# EAGLE board slave-board (EAGLE 9.0.1)
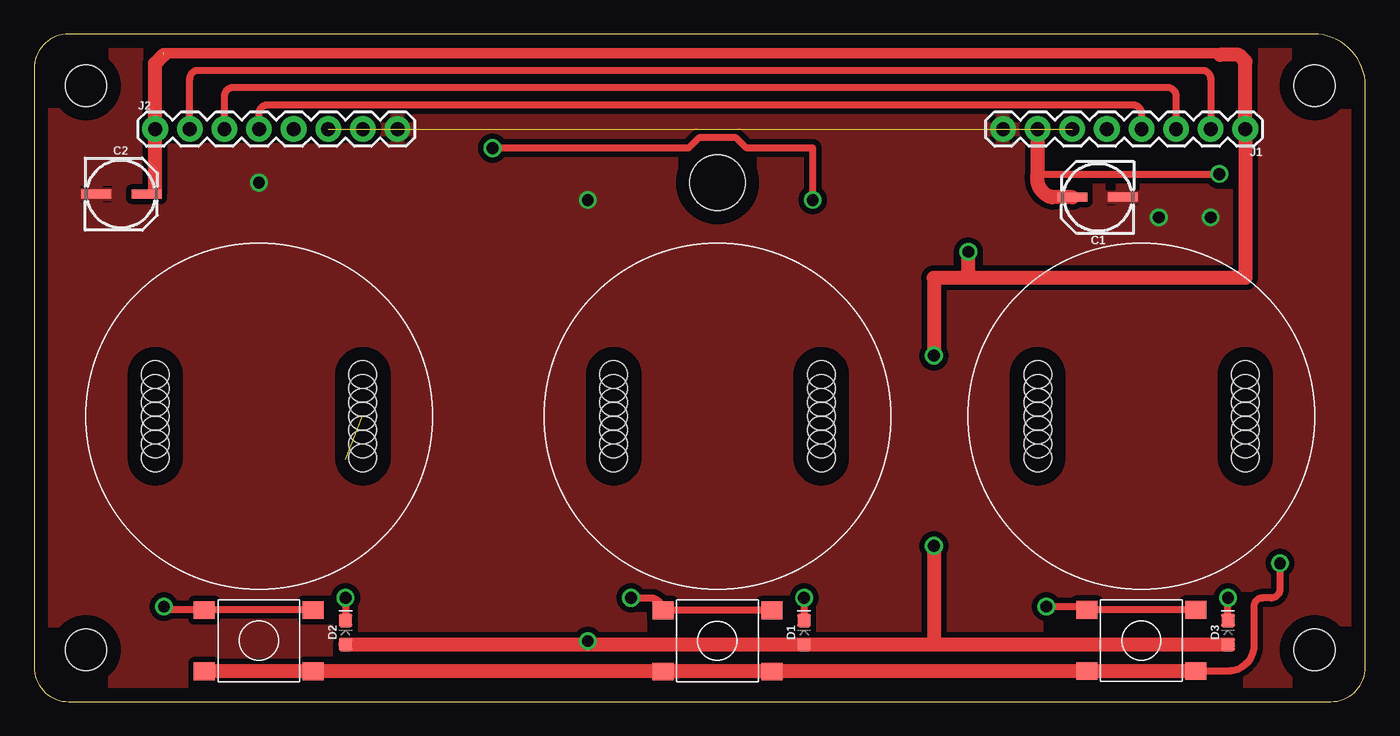
[diagram p0: board, top side]
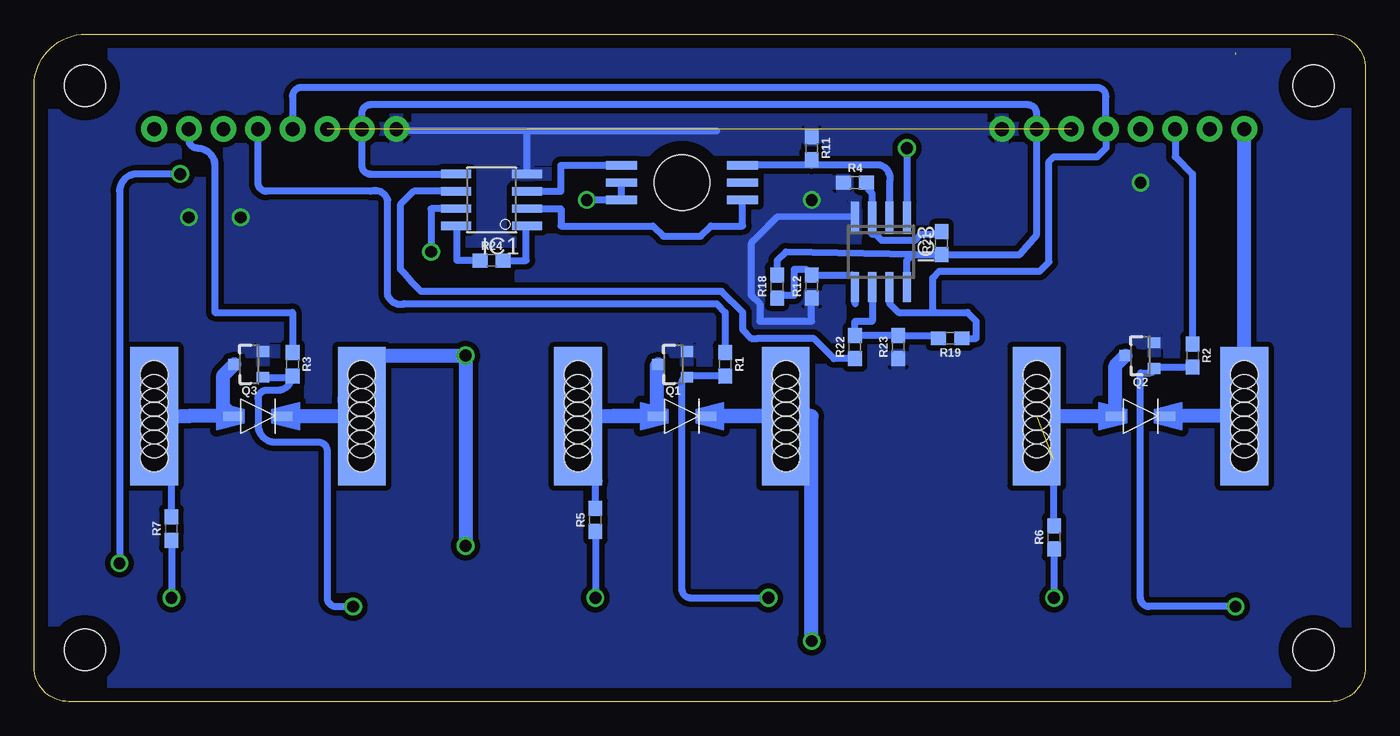
[diagram p1: board, bottom side, seen from below]

Size 97.71 x 49.01 mm. Coordinates in mm from the lower left corner, seen from the top.
Outline: 0,46.47 0,2.54 arc90 2.54,0 95.17,0 arc90 97.71,2.54 97.71,45.2 arc90 93.9,49.01 2.54,49.01 arc90 0,46.47
Copper layers (1*16): Top 0.035mm / dielectric 1.5mm / Bottom 0.035mm
Design rules "default *": minimum track width 6mil, minimum drill 0.35mm, track to track 16mil, track to pad 16mil, pad to pad 16mil, via to via 16mil, smd to smd 16mil, copper to edge 40mil, drill to drill 6mil, minimum pad ring 10mil, minimum via ring 8mil, stop-mask expansion 4mil, vias tented up to drill 0mil, thermal gap 10mil
Holes 3.05 mm at 3.81,3.81 3.81,45.21 93.98,45.21 93.98,3.81

## Footprints (pad centres in the part's own frame; a part is rotated, then mirrored left to right if it is on the bottom)
PANASONIC_C = smd 2.2 x 0.65: + 1.9,-0.2; - -1.8,-0.2
LED-0603 = smd 1 x 1: A -0.877,0; C 0.877,0
SO08 = smd 0.61 x 2.21: 1 -1.905,-2.616; 2 -0.635,-2.616; 3 0.635,-2.616; 4 1.905,-2.616; 5 1.905,2.616; 6 0.635,2.616; 7 -0.635,2.616; 8 -1.905,2.616
SO08' = smd 0.6 x 2.2: 1 -1.905,-2.6; 2 -0.635,-2.6; 3 0.635,-2.6; 4 1.905,-2.6; 5 1.905,2.6; 6 0.635,2.6; 7 -0.635,2.6; 8 -1.905,2.6
1X08 = drill 1.016 pad 1.88: 1 0,0; 2 2.54,0; 3 5.08,0; 4 7.62,0; 5 10.16,0; 6 12.7,0; 7 15.24,0; 8 17.78,0
SOT23-3 = smd 0.8 x 0.9: 1 -0.95,-1; 2 0.95,-1; 3 0,1.1
0603 = smd 1.1 x 1: 1 -0.85,0; 2 0.85,0
2SMPP-03 = smd 2.286 x 0.61 bottom: P$1 4.445,1.27; P$2 4.445,0; P$3 4.445,-1.27; P$4 -4.445,-1.27; P$5 -4.445,0; P$6 -4.445,1.27 | hole 4.064: 0,0
CJV23 = smd 3.5 x 10.16 bottom: P$1 -7.62,0; P$2 7.62,0 | hole 2.032: -7.62,0; 7.62,0; -7.62,1.016; -7.62,2.032; -7.62,3.048; -7.62,-1.016; -7.62,-2.032; -7.62,-3.048; 7.62,-1.016; 7.62,-2.032; 7.62,-3.048; 7.62,1.016; 7.62,2.032; 7.62,3.048
IN4148 = smd 1.422 x 0.711: P$1 1.829,0; P$2 -1.829,0
BUTTON = smd 1.55 x 1.3: P$1 -4,2.25; P$2 -4,-2.25; P$3 4,2.25; P$4 4,-2.25

## Placement (x,y rotation side)
C1  22uF  [PANASONIC_C]  78.11,36.83 180 top
C2  22uF  [PANASONIC_C]  6.35,37.47 0 top
D1  GREEN  [LED-0603]  56.52,5.08 90 top
D2  GREEN  [LED-0603]  22.86,5.08 90 top
D3  GREEN  [LED-0603]  87.63,5.08 90 top
IC1  INA126U  [SO08]  64.14,36.83 90 bottom
IC3  LM358MX  [SO08']  35.56,33.02 180 bottom
J1  [1X08]  88.9,42.04 180 top
J2  [1X08]  8.89,42.04 0 top
Q1  600mA/40V  [SOT23-3]  50.8,24.77 90 bottom
Q2  600mA/40V  [SOT23-3]  16.51,25.4 90 bottom
Q3  600mA/40V  [SOT23-3]  81.92,24.77 90 bottom
R1  1k  [0603]  46.99,24.77 270 bottom
R2  1k  [0603]  12.7,25.4 270 bottom
R3  1k  [0603]  78.74,24.77 270 bottom
R4  10k  [0603]  37.47,38.1 0 bottom
R5  10k  [0603]  56.52,13.34 90 bottom
R6  10k  [0603]  22.86,12.06 90 bottom
R7  10k  [0603]  87.63,12.7 90 bottom
R11  10k  [0603]  40.64,40.64 270 bottom
R12  10k  [0603]  40.64,30.48 90 bottom
R18  10k  [0603]  43.18,30.48 90 bottom
R19  10k  [0603]  30.48,26.67 180 bottom
R21  40K  [0603]  31.11,33.66 90 bottom
R22  20K  [0603]  37.47,26.04 90 bottom
R23  20K  [0603]  34.29,26.04 90 bottom
R24  2K  [0603]  64.14,32.38 0 bottom
U$1  2SMPP-03  [2SMPP-03]  50.16,38.1 180 top
U$2  CJV23-SOLENOID-VALVE  [CJV23]  50.16,20.95 0 top
U$3  CJV23-SOLENOID-VALVE  [CJV23]  16.51,20.95 0 top
U$4  CJV23-SOLENOID-VALVE  [CJV23]  81.28,20.95 0 top
U$5  IN4148  [IN4148]  50.16,20.95 0 bottom
U$6  IN4148  [IN4148]  16.51,20.95 0 bottom
U$7  IN4148  [IN4148]  81.28,20.95 0 bottom
U$8  BUTTON  [BUTTON]  50.15,4.46 180 top
U$9  BUTTON  [BUTTON]  16.5,4.47 180 top
U$10  BUTTON  [BUTTON]  81.27,4.49 180 top

## Library data of the parts
C1 C2 = SparkFun-Capacitors; PROD_ID: CAP-08618
D1-D3 = SparkFun-LED; PROD_ID: DIO-00821
IC1 = INA126; AVAILABILITY: Unavailable; DESCRIPTION: the ina126 and ina2126 are precision instrumentation amplifiers for accurate low noise differential signal acquisitio...; MF: Texas Instruments; MP: INA126; PACKAGE: TSSOP-8 Texas Instruments; PRICE: None
IC3 = linear
J1 J2 = SparkFun-Connectors; PROD_ID: CONN-08438
Q1-Q3 = SparkFun-DiscreteSemi; PROD_ID: TRANS-08049
R1-R3 = SparkFun-Resistors; PROD_ID: RES-07856
R4-R7 R11 R12 R18 R19 R21-R24 = SparkFun-Resistors; PROD_ID: RES-00824
U$1-U$10 = programmable-air-components

## Nets
GND: C1.- C2.- IC1.4 IC3.4 J1.8 J2.8 Q1.2 Q2.2 Q3.2 R4.1 R11.1 R12.1 R23.1
N$1: Q1.1 R1.2 U$8.P$2 U$8.P$4
N$2: Q2.1 R2.2 U$9.P$2 U$9.P$4
N$3: Q3.1 R3.2 U$10.P$2 U$10.P$4
N$4: IC1.2 U$1.P$1
N$5: J1.2 J2.2 R3.1
N$6: D3.C R7.1
N$7: Q3.3 R7.2 U$4.P$2 U$7.P$2
N$8: Q2.3 R6.2 U$3.P$2 U$6.P$2
N$9: Q1.3 R5.2 U$2.P$2 U$5.P$2
N$10: J1.3 J2.3 R2.1
N$11: D2.C R6.1
N$12: J1.4 J2.4 R1.1
N$13: IC3.7 J1.5 J2.5 R19.1
N$14: J1.6 J2.6
N$15: C1.+ IC1.5 IC3.8 J1.7 J2.7 R18.2 R21.1 U$8.P$1 U$8.P$3 U$9.P$1 U$9.P$3 U$10.P$1 U$10.P$3
N$16: IC1.6 R22.1
N$18: D1.C R5.1
N$19: IC3.1 U$1.P$5 U$1.P$6
N$20: IC1.3 U$1.P$4
N$24: IC3.3 R4.2 R21.2
N$25: IC1.8 R24.1
N$26: IC1.1 R24.2
N$27: IC3.6 R19.2 R22.2 R23.2
N$30: IC3.5 R12.2 R18.1
N$31: IC3.2 R11.2 U$1.P$3
VIN: C2.+ D1.A D2.A D3.A IC1.7 J1.1 J2.1 U$2.P$1 U$3.P$1 U$4.P$1 U$5.P$1 U$6.P$1 U$7.P$1

## Tracks (layer width: path | path; a pad name or v marks a point on that pad's centre or on a via)
GND  (via drill 0.86)
  Bottom 0.508: IC1.4 61.52,41.83 arc-90 61.59,41.91 | 61.59,41.91 70.99,41.91 arc90 J1.8 | 61.59,41.91 47.62,41.91 | 26.8,41.91 arc-90 J2.8 | IC3.4 43.18,35.56 45.09,33.66 45.09,29.84 44.45,29.21 44.45,27.94 40.64,27.94 R12.1
  other vias: 16.51,38.1 86.36,35.56 40.64,36.83 82.55,35.56
  pour Top: 101.6,53.34 101.6,-5.08 -5.08,-5.08 -5.08,53.34
  pour Bottom: 99.06,50.8 99.06,-2.54 -2.54,-2.54 -2.54,50.8
N$1  (via drill 0.86)
  Top 0.508: U$8.P$2 U$8.P$4 arc90 45.24,7.62 v43.81,7.62
  Bottom 0.508: R1.2 49.7,23.91 arc-90 Q1.1 arc-90 50.16,23.45 50.16,8.26 arc-90 49.53,7.62 v43.81,7.62
N$2  (via drill 0.86)
  Top 0.508: U$9.P$2 U$9.P$4 9.79,6.72 arc-90 v9.53,6.99
  Bottom 0.508: R2.2 15.41,24.55 arc-90 Q2.1 arc90 15.83,24.13 16.51,24.13 16.51,7.62 arc-90 15.88,6.99 v9.53,6.99
N$3  (via drill 0.86)
  Top 0.508: U$10.P$2 U$10.P$4 | 76.83,6.74 U$10.P$4 | v74.3,6.99 77.02,6.99 arc-90 U$10.P$4
  Bottom 0.508: Q3.1 78.84,23.82 | 78.84,23.82 arc-90 R3.2 | 78.84,23.82 arc90 79.8,22.86 80.64,22.86 arc-90 81.28,22.23 81.28,20.32 arc-90 80.01,19.05 76.83,19.05 arc90 76.2,18.41 76.2,7.62 arc-90 75.56,6.99 v74.3,6.99
N$4
  Bottom 0.508: IC1.2 59.05,36.2 59.05,34.92 52.3,34.92 51.53,34.16 48.8,34.16 48.03,34.92 45.72,34.92 U$1.P$1
N$5
  Top 0.508: J2.2 11.43,45.72 arc-90 12.06,46.35 85.72,46.35 arc-90 86.36,45.72 J1.2
  Bottom 0.508: R3.1 78.74,28.57 84.45,28.57 84.45,39.37 arc-90 85.72,40.64 arc90 86.36,41.27 J1.2
N$6  (via drill 0.86)
  Top 0.508: D3.C v87.63,7.62
  Bottom 0.508: R7.1 v87.63,7.62
N$7
  Bottom 0.508: U$4.P$2 88.27,20.95 | 88.27,20.95 86.36,20.95 | 83.82,23.96 83.82,20.95 | R7.2 87.63,20.32 arc-90 88.27,20.95
  Bottom 1.016: U$4.P$2 86.36,20.95 83.82,20.95 U$7.P$2 83.82,21.67 83.82,23.96 Q3.3
N$8  (1 unrouted)
  Bottom 0.508: U$6.P$2 18.41,20.95 18.41,24.59 arc90 Q2.3 | R6.2 22.86,17.78
  Bottom 1.016: U$3.P$2 18.41,20.95 | U$6.P$2 18.34,24.67 Q2.3
N$9
  Bottom 0.508: U$2.P$2 56.52,20.95 | 56.52,20.95 55.24,20.95 | R5.2 56.52,15.94 56.23,16.23 56.23,20.67 arc-90 56.52,20.95
  Bottom 1.016: U$5.P$2 55.24,20.95 | U$2.P$2 U$5.P$2 | U$5.P$2 51.99,24.67 Q1.3
N$10
  Top 0.508: J1.3 83.82,44.45 arc90 83.19,45.09 14.61,45.09 arc90 13.97,44.45 J2.3
  Bottom 0.508: J2.3 13.97,40.01 12.7,38.73 R2.1
N$11  (via drill 0.86)
  Top 0.508: v22.86,7.62 D2.C
  Bottom 0.508: R6.1 v22.86,7.62
N$12
  Top 0.508: J2.4 16.51,43.18 arc-90 17.14,43.81 80.64,43.81 arc-90 81.28,43.18 J1.4
  Bottom 0.508: J1.4 81.28,38.1 arc-90 80.64,37.47 73.03,37.47 arc90 71.75,36.83 71.75,29.84 arc-90 70.48,29.21 47.62,29.21 46.99,28.57 R1.1
N$13
  Bottom 0.508: J1.5 78.74,44.45 arc90 78.11,45.09 19.68,45.09 arc90 19.05,44.45 J2.5 19.05,40.64 19.68,40.01 22.86,40.01 23.22,39.65 23.22,32.28 23.9,31.59 31.27,31.59 31.75,31.11 31.75,28.57 | IC3.7 34.92,29.21 34.29,28.57 31.75,28.57 | 31.75,28.57 29.21,28.57 28.57,27.94 28.57,26.67 R19.1
N$14  (1 unrouted)
N$15  (via drill 0.86)
  Top 0.508: U$8.P$1 U$8.P$3 45.72,2.21 U$9.P$1 20.32,2.23 U$9.P$3 | 85.6,1.91 arc-90 U$10.P$1 87.63,2.24 arc90 89.53,4.14 89.53,6.99 arc-90 90.17,7.62 90.81,7.62 arc90 91.44,8.26 v91.44,10.16 | J1.7 73.66,41.91 | 73.66,38.73 v87,38.73
  Top 1.016: C1.+ 74.73,37.03 arc-90 73.66,38.73 73.66,41.91 | U$10.P$1 U$10.P$3 arc-90 77.23,2.21 U$8.P$1 45.72,2.21 | 45.72,2.21 arc-90 45.72,2.21 | U$8.P$3 20.34,2.21 arc-90 20.32,2.23 | U$9.P$1 U$9.P$3
  Bottom 0.508: 66.04,38.73 IC1.5 73.03,38.73 arc90 73.66,39.37 J1.7 73.66,43.18 arc90 73.03,43.81 24.77,43.81 arc90 24.13,43.18 J2.7 24.13,34.29 25.4,32.8 R21.1 33.02,32.8 | v87,38.73 90.17,38.73 arc-90 91.44,37.47 v91.44,10.16 | 33.66,31.11 IC3.8 33.66,32.38 33.23,32.8 33.02,32.8 | R18.2 43.18,32.38 42.55,33.02 33.02,32.8
N$16
  Bottom 0.508: IC1.6 69.85,37.47 70.84,36.47 70.84,31.75 70.48,31.39 69.96,30.76 69.32,30.12 47.25,30.12 45.71,28.59 45.72,27.3 45.09,26.67 44.59,26.67 44.57,26.7 40.52,26.7 39.01,25.18 R22.1
N$18  (via drill 0.86)
  Top 0.508: v56.52,7.62 D1.C
  Bottom 0.508: R5.1 v56.52,7.62
N$19  (via drill 0.86)
  Top 0.508: v57.15,36.83 57.15,40.64 52.3,40.64 51.53,41.4 48.8,41.4 48.03,40.64 v33.66,40.64
  Bottom 0.508: U$1.P$5 U$1.P$6 v57.15,36.83 | v33.66,40.64 IC3.1
N$20
  Bottom 0.508: IC1.3 59.05,37.47 59.05,39.37 U$1.P$4
N$24
  Bottom 0.508: R4.2 36.47,37.96 36.47,37.57 36.2,37.29 IC3.3 36.2,34.29 35.93,34.29 35.5,33.86 33.08,33.86 32.65,34.29 31.33,34.29 R21.2
N$25
  Bottom 0.508: IC1.8 arc90 66.67,34.85 66.67,32.38 R24.1
N$26
  Bottom 0.508: IC1.1 arc-90 61.59,34.85 61.59,32.38 R24.2
N$27
  Bottom 0.508: 36.2,31.11 IC3.6 36.2,27.94 37.47,27.94 R22.2 R23.2 31.55,26.89 R19.2
N$30
  Bottom 0.508: 37.47,29.21 IC3.5 37.47,31.11 37.68,31.33 R12.2 41.06,31.75 41.91,31.75 41.91,29.84 42.97,29.84 R18.1
N$31
  Bottom 0.508: IC3.2 34.92,38.1 arc-90 35.56,39.37 40.64,39.37 | 40.64,39.37 U$1.P$3 | R11.2 40.64,39.37
VIN  (via drill 0.86, 0.89)  (2 unrouted)
  Top 0.508: 88.27,47.62 9.53,47.62 | v40.64,4.45 40.64,4.2 | C2.+ 8.89,37.47
  Top 0.762: 9.53,47.62 88.27,47.62 88.9,46.99
  Top 1.016: 8.89,37.47 J2.1 8.89,46.85 9.53,47.49 | 68.58,31.11 88.9,31.11 J1.1 88.9,46.99 88.4,47.49 87.03,47.49 | 68.58,31.11 v68.58,33.02 | 68.58,31.11 66.04,31.11 v66.04,25.4 | 66.04,4.2 D1.A 40.64,4.2 D2.A | 66.04,4.2 D3.A | v66.04,11.43 66.04,4.2
  Bottom 0.508: IC1.7 68.58,36.2 v68.58,33.02 | U$4.P$1 U$7.P$1 | U$2.P$1 43.81,20.95 | U$3.P$1 10.16,20.95
  Bottom 1.016: 8.89,22.23 arc90 10.16,20.95 | 42.55,22.86 42.55,22.23 arc90 43.81,20.95 U$5.P$1 40.64,20.95 v40.64,4.45 | U$7.P$1 74.93,20.95 arc-90 73.66,22.23 73.66,22.86 | 74.93,22.23 arc-90 U$4.P$1 73.66,24.13 arc90 72.39,25.4 v66.04,25.4 v66.04,11.43 | U$6.P$1 U$3.P$1 J2.1